# EAGLE board Master board (EAGLE 9.6.1)
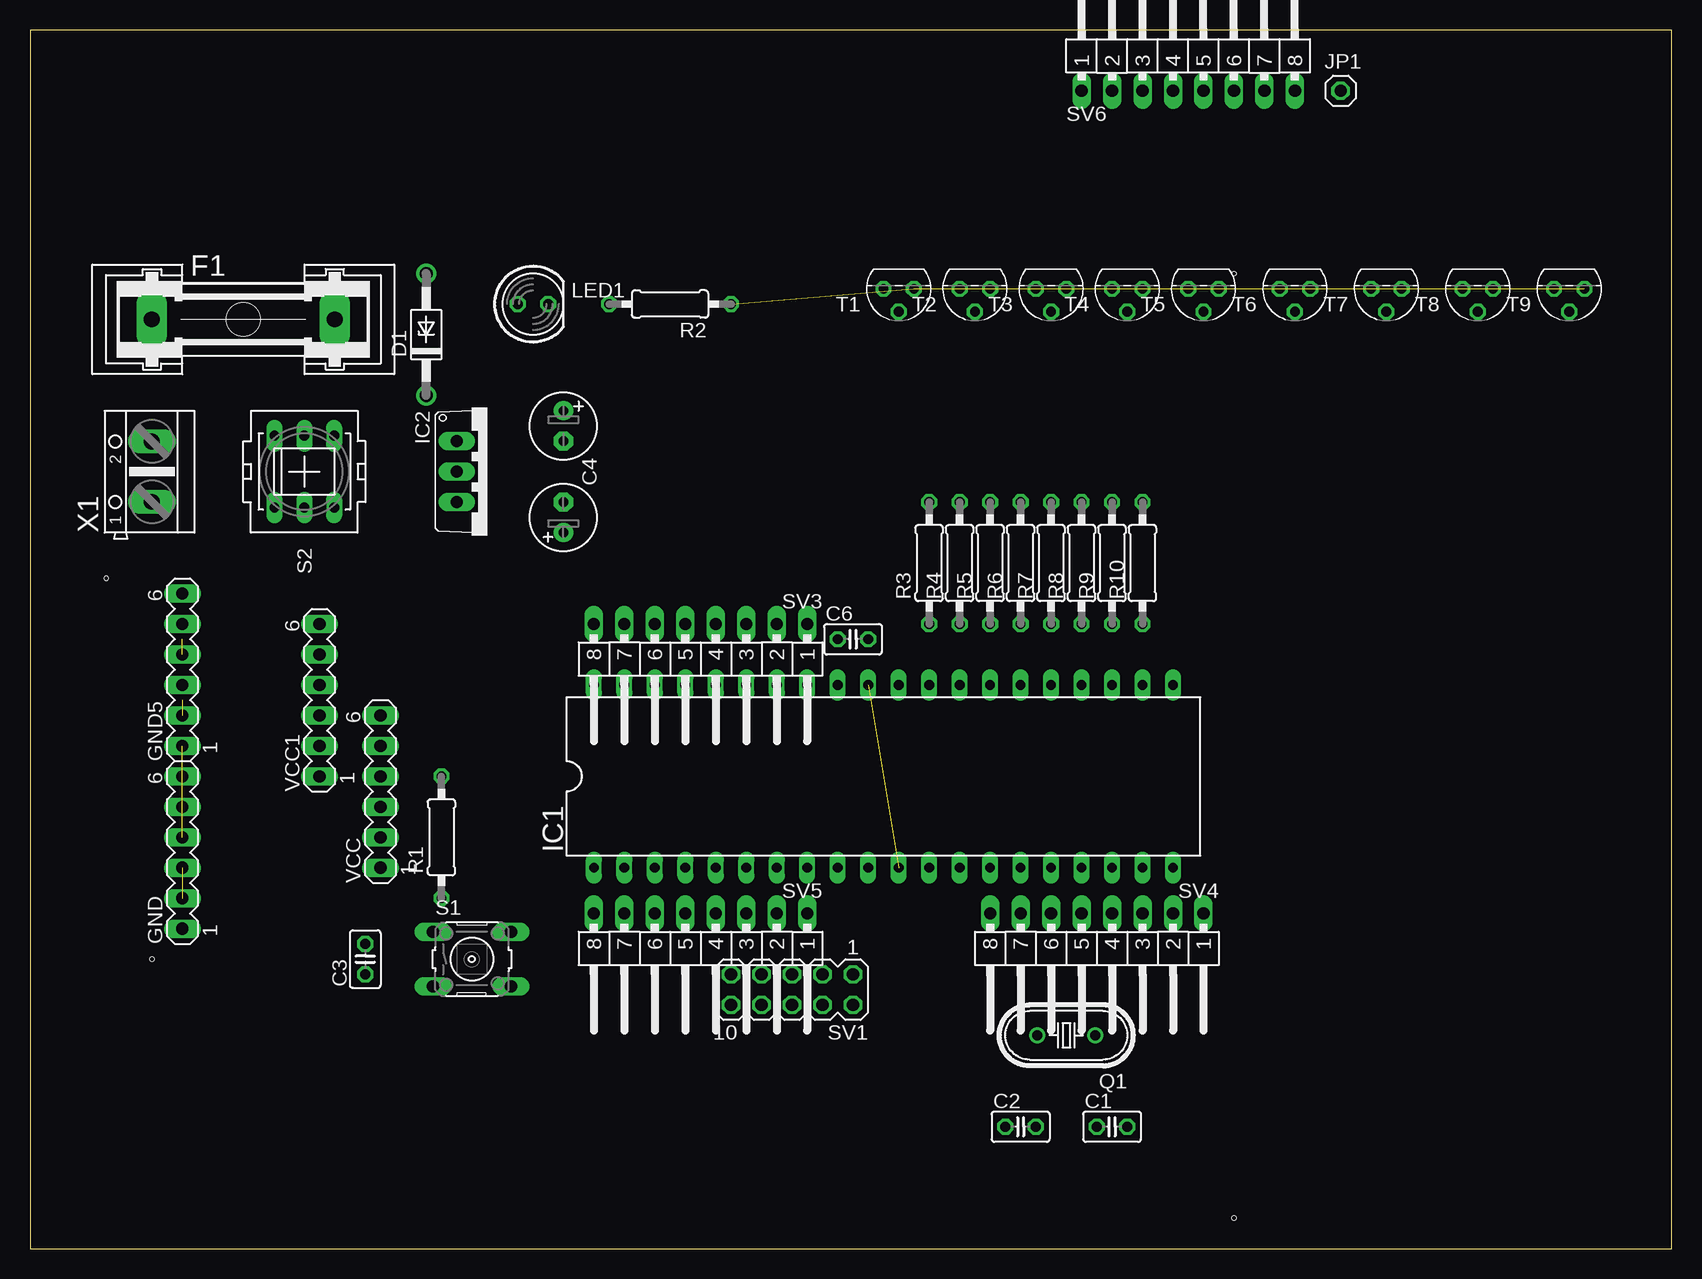
[diagram p0: board, top side]
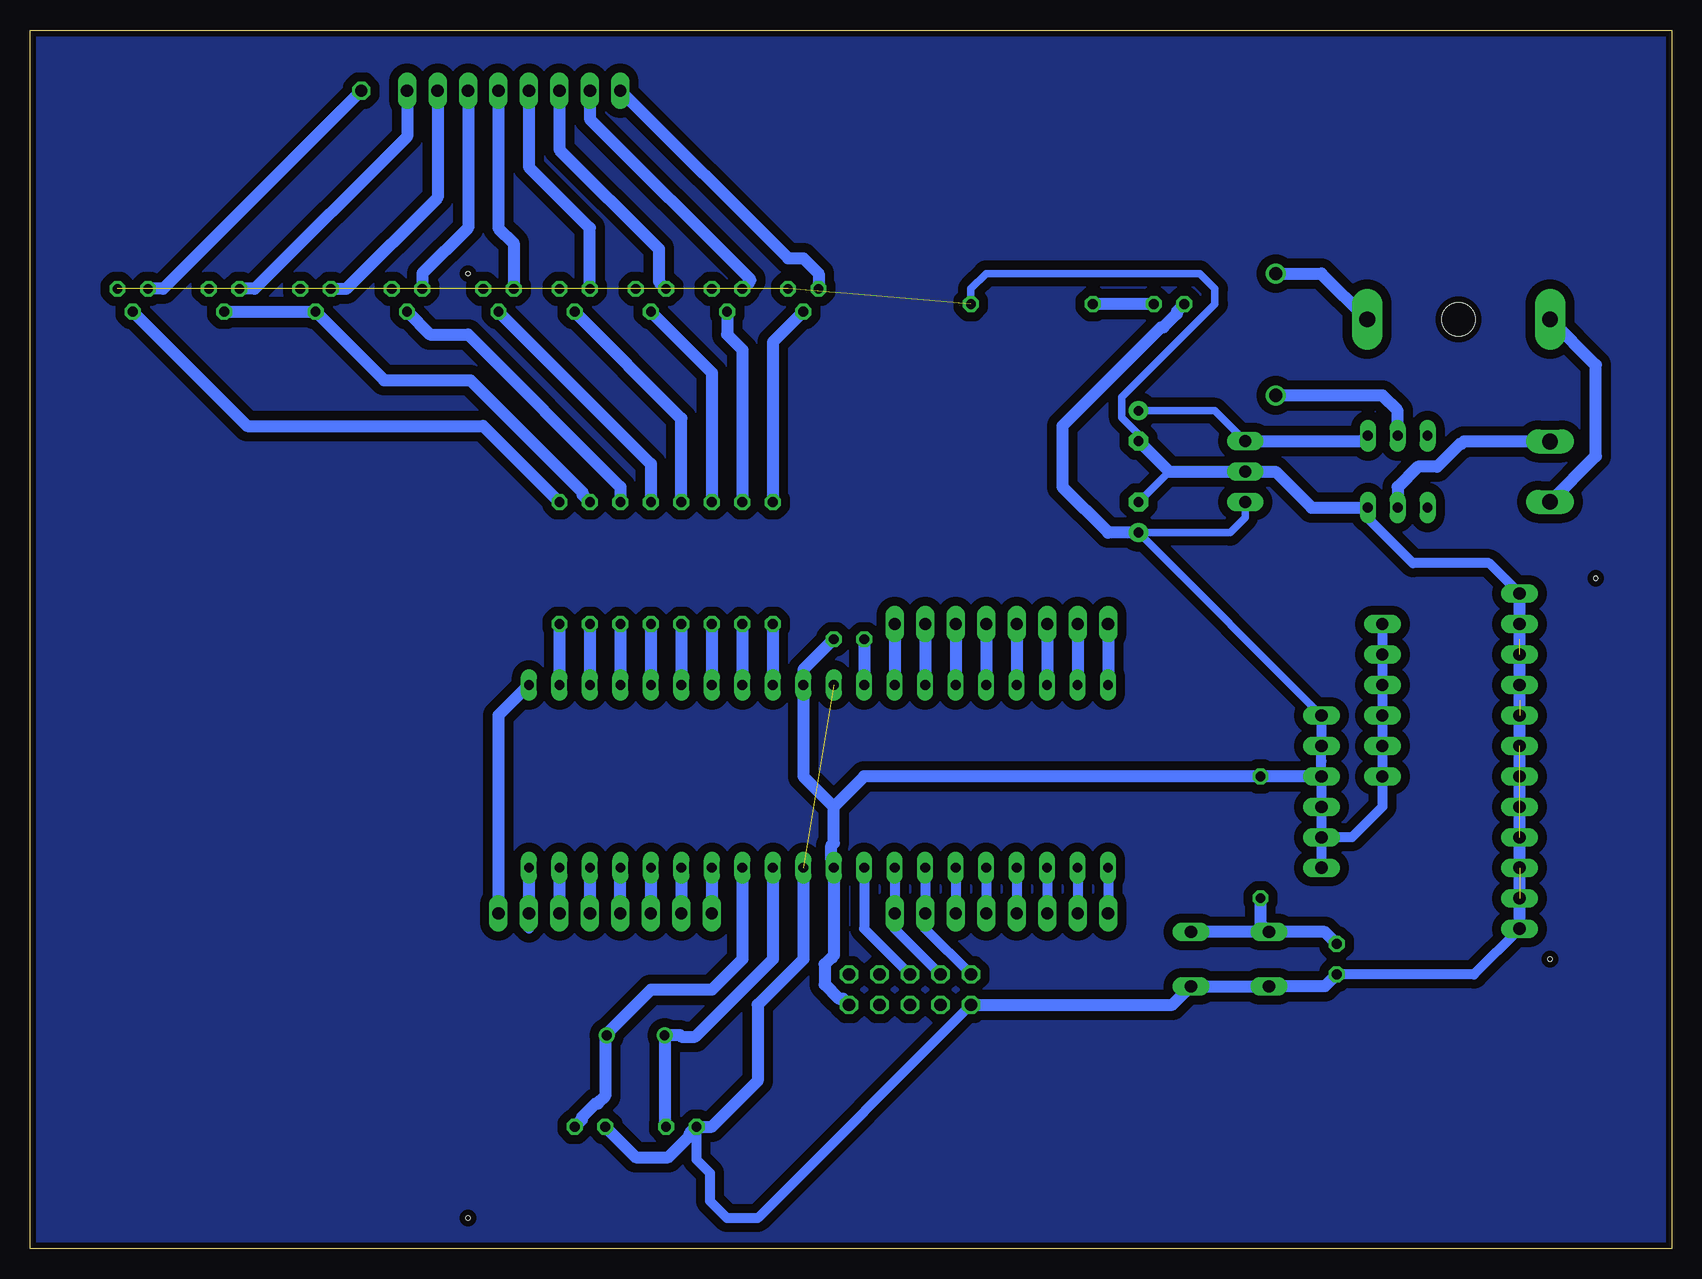
[diagram p1: board, bottom side, seen from below]

Size 136.83 x 101.59 mm. Coordinates in mm from the lower left corner, seen from the top.
Outline: 0,0 136.83,0 136.83,101.59 0,101.59 0,0
Copper layers (1*16): Top 0.035mm / dielectric 1.5mm / Bottom 0.035mm
Design rules "default *": minimum track width 25mil, minimum drill 0.35mm, track to track 30mil, track to pad 30mil, pad to pad 30mil, via to via 6mil, smd to smd 6mil, copper to edge 20mil, drill to drill 6mil, minimum pad ring 10mil, minimum via ring 8mil, stop-mask expansion 4mil, vias tented up to drill 0mil, thermal gap 10mil
Holes 0.35 mm at 100.33,81.28 6.35,55.88 10.16,24.13 100.33,2.54

## Footprints (pad centres in the part's own frame; a part is rotated, then mirrored left to right if it is on the bottom)
C025-025X050 = drill 0.813 octagon: 1 -1.27,0; 2 1.27,0
E2,5-6 = drill 0.813 pad 1.6: + -1.27,0 | drill 0.813 pad 1.6 octagon: - 1.27,0
DO41Z10 = drill 1.118: A 5.08,0; C -5.08,0
GSH15 = drill 1.321 pad 2.54 long: 1 -7.62,0; 2 7.62,0 | hole 2.794: 0,0
MA06-1 = drill 1.016 long: 1 -6.35,0; 2 -3.81,0; 3 -1.27,0; 4 1.27,0; 5 3.81,0; 6 6.35,0
DIL40 = drill 0.813 long: 1 -24.13,-7.62; 2 -21.59,-7.62; 3 -19.05,-7.62; 4 -16.51,-7.62; 5 -13.97,-7.62; 6 -11.43,-7.62; 7 -8.89,-7.62; 8 -6.35,-7.62; 9 -3.81,-7.62; 10 -1.27,-7.62; 11 1.27,-7.62; 12 3.81,-7.62; 13 6.35,-7.62; 14 8.89,-7.62; 15 11.43,-7.62; 16 13.97,-7.62; 17 16.51,-7.62; 18 19.05,-7.62; 19 21.59,-7.62; 20 24.13,-7.62; 21 24.13,7.62; 22 21.59,7.62; 23 19.05,7.62; 24 16.51,7.62; 25 13.97,7.62; 26 11.43,7.62; 27 8.89,7.62; 28 6.35,7.62; 29 3.81,7.62; 30 1.27,7.62; 31 -1.27,7.62; 32 -3.81,7.62; 33 -6.35,7.62; 34 -8.89,7.62; 35 -11.43,7.62; 36 -13.97,7.62; 37 -16.51,7.62; 38 -19.05,7.62; 39 -21.59,7.62; 40 -24.13,7.62
TO220V = drill 1.016 long: 1 -2.54,-2.54; 2 0,-2.54; 3 2.54,-2.54
1X01 = drill 1.016 octagon: 1 0,0
LED5MM = drill 0.813 octagon: A -1.27,0; K 1.27,0
HC49U70 = drill 0.813: 1 -2.413,0; 2 2.413,0
0207/10 = drill 0.813 octagon: 1 -5.08,0; 2 5.08,0
B3F-10XX = drill 1.016 long: 1 -3.251,2.261; 2 3.251,2.261; 3 -3.251,-2.261; 4 3.251,-2.261
PVA2R = drill 0.813 long: 1 -2.997,2.489; 2 -2.997,0; 3 -2.997,-2.489; 4 2.997,2.489; 5 2.997,0; 6 2.997,-2.489
MA05-2 = drill 1.016 octagon: 1 -5.08,-1.27; 2 -5.08,1.27; 3 -2.54,-1.27; 4 -2.54,1.27; 5 0,-1.27; 6 0,1.27; 7 2.54,-1.27; 8 2.54,1.27; 9 5.08,-1.27; 10 5.08,1.27
MA08-1W = drill 1.016 long: 1 -8.89,0; 2 -6.35,0; 3 -3.81,0; 4 -1.27,0; 5 1.27,0; 6 3.81,0; 7 6.35,0; 8 8.89,0
TO92 = drill 0.813 octagon: 1 1.27,0; 2 0,1.905; 3 -1.27,0
AK500/2 = drill 1.321 long: 1 -2.515,0; 2 2.515,0

## Placement (x,y rotation side)
C1  22pf  [C025-025X050]  90.17,10.16 0 top
C2  22pf  [C025-025X050]  82.55,10.16 0 top
C3  [C025-025X050]  27.94,24.13 90 top
C4  10uf  [E2,5-6]  44.45,68.58 270 top
C5  10uf  [E2,5-6]  44.45,60.96 90 top
C6  [C025-025X050]  68.58,50.8 0 top
D1  1N4728  [DO41Z10]  33.02,76.2 90 top
F1  [GSH15]  17.78,77.47 0 top
GND  [MA06-1]  12.7,33.02 90 top
GND5  [MA06-1]  12.7,48.26 90 top
IC1  MEGA16-P  [DIL40]  71.12,39.37 0 top
IC2  7805TV  [TO220V]  38.1,64.77 270 top
JP1  [1X01]  109.22,96.52 0 top
LED1  [LED5MM]  41.91,78.74 0 top
Q1  [HC49U70]  86.36,17.78 180 top
R1  10k  [0207/10]  34.29,34.29 90 top
R2  220  [0207/10]  53.34,78.74 180 top
R3  [0207/10]  74.93,57.15 90 top
R4  [0207/10]  77.47,57.15 90 top
R5  [0207/10]  80.01,57.15 90 top
R6  [0207/10]  82.55,57.15 90 top
R7  [0207/10]  85.09,57.15 90 top
R8  [0207/10]  87.63,57.15 90 top
R9  [0207/10]  90.17,57.15 90 top
R10  [0207/10]  92.71,57.15 90 top
S1  [B3F-10XX]  36.83,24.13 0 top
S2  PVA2R  [PVA2R]  22.86,64.77 270 top
SV1  [MA05-2]  63.5,21.59 180 top
SV3  [MA08-1W]  55.88,52.07 180 top
SV4  [MA08-1W]  88.9,27.94 180 top
SV5  [MA08-1W]  55.88,27.94 180 top
SV6  [MA08-1W]  96.52,96.52 0 top
T1  2N5088  [TO92]  72.39,80.01 180 top
T2  2N5088  [TO92]  78.74,80.01 180 top
T3  2N5088  [TO92]  85.09,80.01 180 top
T4  2N5088  [TO92]  91.44,80.01 180 top
T5  2N5088  [TO92]  97.79,80.01 180 top
T6  2N5088  [TO92]  105.41,80.01 180 top
T7  2N5088  [TO92]  113.03,80.01 180 top
T8  2N5088  [TO92]  120.65,80.01 180 top
T9  2N5088  [TO92]  128.27,80.01 180 top
VCC  [MA06-1]  29.21,38.1 90 top
VCC1  [MA06-1]  24.13,45.72 90 top
X1  [AK500/2]  10.16,64.77 90 top

## Library data of the parts
C1-C6 = rcl; SPICEPREFIX: C
D1 = diode
F1 = fuse; MPN: 64900001039; OC_FARNELL: 1271673; OC_NEWARK: 02P0318
GND GND5 SV1 SV3-SV6 VCC VCC1 = con-lstb; OC_FARNELL: unknown; OC_NEWARK: unknown
IC1 = atmel; MPN: ATMEGA16-16PU; OC_FARNELL: 9171142; OC_NEWARK: 01M6885
IC2 = linear
JP1 = pinhead
LED1 = led
Q1 = crystal; OC_FARNELL: unknown; OC_NEWARK: unknown
R1-R10 = rcl; SPICEPREFIX: R
S1 = switch-omron; MPN: B3F-1000; OC_FARNELL: 176432; OC_NEWARK: 36M3542
S2 = switch-misc
T1-T9 = transistor-neu-to92
X1 = con-ptr500; OC_FARNELL: unknown; OC_NEWARK: unknown

## Nets
GND: C1.1 C2.1 C3.1 C4.- C5.- GND5.1 GND5.2 GND5.3 GND5.4 GND5.5 GND5.6 GND.1 GND.2 GND.3 GND.4 GND.5 GND.6 IC1.11 IC1.31 IC2.2 R2.1 S1.3 S1.4 S2.4 SV1.10 T1.3 T2.3 T3.3 T4.3 T5.3 T6.3 T7.3 T8.3 T9.3
N$1: C1.2 IC1.13 Q1.1
N$2: C2.2 IC1.12 Q1.2
N$3: IC1.6 SV5.3
N$4: IC1.7 SV1.9 SV5.2
N$5: IC1.8 SV1.7 SV5.1
N$6: C4.+ IC2.1 S2.1
N$7: IC1.21 SV4.1
N$8: C3.2 R1.1 S1.1 S1.2
N$9: LED1.K R2.2
N$10: IC1.33 SV3.1
N$11: IC1.34 SV3.2
N$12: IC1.35 SV3.3
N$13: IC1.36 SV3.4
N$14: IC1.20 SV4.2
N$15: D1.A F1.2
N$16: F1.1 X1.1
N$17: D1.C S2.2
N$18: IC1.19 SV4.3
N$19: S2.5 X1.2
N$20: IC1.29 R3.1
N$21: IC1.28 R4.1
N$22: IC1.23 R9.1
N$23: IC1.27 R5.1
N$24: IC1.26 R6.1
N$25: IC1.25 R7.1
N$26: IC1.22 R10.1
N$28: IC1.37 SV3.5
N$29: IC1.38 SV3.6
N$30: IC1.39 SV3.7
N$31: IC1.40 SV3.8
N$32: IC1.18 SV4.4
N$33: C6.1 IC1.32
N$34: IC1.17 SV4.5
N$35: IC1.16 SV4.6
N$36: IC1.15 SV4.7
N$37: IC1.14 SV4.8
N$38: IC1.5 SV5.4
N$39: IC1.4 SV5.5
N$40: IC1.3 SV5.6
N$41: C5.+ C6.2 IC1.10 IC1.30 IC2.3 LED1.A R1.2 SV1.2 VCC1.1 VCC1.2 VCC1.3 VCC1.4 VCC1.5 VCC1.6 VCC.1 VCC.2 VCC.3 VCC.4 VCC.5 VCC.6
N$42: IC1.2 SV5.7
N$43: IC1.1 SV5.8
N$45: R4.2 T2.2
N$47: R5.2 T3.2
N$48: R3.2 T1.2
N$50: R6.2 T4.2
N$52: R7.2 T5.2
N$53: IC1.24 R8.1
N$54: R8.2 T6.2
N$56: R9.2 T7.2 T8.2
N$58: R10.2 T9.2
N$59: SV6.2 T2.1
N$60: SV6.3 T3.1
N$61: SV6.4 T4.1
N$62: SV6.5 T5.1
N$63: SV6.1 T1.1
N$64: SV6.6 T6.1
N$65: SV6.7 T7.1
N$66: SV6.8 T8.1
N$68: JP1.1 T9.1
S$1: IC1.9 SV1.5

## Tracks (layer width: path | path; a pad name or v marks a point on that pad's centre or on a via)
22
  pour Bottom: 0,0 137.16,0 137.16,101.6 0,101.6
GND  (16 unrouted)
  Bottom 0.254: 76.2,20.32 76.2,15.24 | 33.02,21.87 S1.3 | 40.5,21.45 41.63,20.32
  Bottom 0.381: 80.01,3.81 80.17,3.98 | SV1.10 71.12,7.62
  Bottom 0.635: 33.02,64.77 31.29,63.04 | C5.- 41.91,64.77 | GND5.1 GND.2 | C4.- 44.45,67.87 45.85,69.27 45.85,70.99 38.1,78.74 38.1,80.01 39.37,81.28 57.15,81.28 58.42,80.01 R2.1
  Bottom 0.813: C2.1 81.28,7.41 80.17,6.3 80.17,3.98 | 80.01,3.81 78.74,2.54 76.2,2.54 SV1.10 | GND.2 GND.1 16.51,22.86 C3.1 | S1.3 S1.4 40.5,21.45 | 12.7,50.8 GND5.5 GND5.6 15.24,57.15 21.59,57.15 25.35,60.91 S2.4 | 12.7,45.72 GND5.3 | GND5.2 GND5.1
  Bottom 1.016: C4.- 41.91,64.77 IC2.2 33.02,64.77 30.02,61.77 S2.4 | SV1.10 41.63,20.32 S1.4 33.02,21.87 28.93,21.87 C3.1 | GND.1 GND5.6 | C1.1 86.36,7.62 83.63,7.62 81.89,9.36 81.89,9.55 C2.1 80.01,10.16 76.2,13.97 76.2,20.32 72.39,24.13 IC1.11
N$1
  Bottom 0.254: 88.9,17.78 Q1.1
  Bottom 0.635: C1.2 88.9,12.7 88.9,17.78
  Bottom 1.016: Q1.1 88.9,17.65 88.9,12.7 89.51,12.09 89.7,12.09 90.83,10.96 90.83,10.77 C1.2 | IC1.13 77.47,24.13 80.01,21.59 85.09,21.59 88.9,17.78
N$2
  Bottom 0.635: C2.2 83.82,17.65 | 83.82,17.65 Q1.2 | 83.82,17.65 82.55,17.65
  Bottom 1.016: C2.2 83.95,10.29 Q1.2 82.68,17.78 82.55,17.65 81.41,17.65 74.93,24.13 IC1.12
N$3
  Bottom 0.813: IC1.6 SV5.3
N$4
  Bottom 0.381: SV1.9 62.23,26.67
  Bottom 0.813: 58.42,22.88 58.45,22.88 62.23,26.67 SV5.2 IC1.7
N$5
  Bottom 0.813: SV1.7 64.77,26.67 SV5.1 IC1.8
N$6
  Bottom 0.254: IC2.1 36.83,67.31
  Bottom 0.635: 25.4,67.77 S2.1 | IC2.1 38.1,69.85 C4.+
  Bottom 1.016: IC2.1 25.86,67.31 25.4,67.77
N$7
  Bottom 1.016: IC1.21 97.79,44.45 SV4.1
N$8
  Bottom 1.016: C3.2 28.93,26.39 S1.1 | R1.1 34.29,27.1 S1.1 | S1.1 S1.2 40.22,26.25
N$9
  Bottom 1.016: LED1.K R2.2
N$10
  Bottom 1.016: SV3.1 IC1.33
N$11
  Bottom 1.016: SV3.2 IC1.34
N$12
  Bottom 1.016: SV3.3 IC1.35
N$13
  Bottom 1.016: SV3.4 IC1.36
N$14
  Bottom 0.813: SV4.2 95.25,26.67
  Bottom 1.016: IC1.20 SV4.2
N$15
  Bottom 1.016: D1.A 29.21,81.28 F1.2
N$16
  Bottom 1.016: X1.1 6.35,66.06 6.35,73.66 F1.1
N$17
  Bottom 0.635: 26.21,71.12 D1.C
  Bottom 1.016: S2.2 22.86,69.85 24.13,71.12 D1.C
N$18
  Bottom 1.016: IC1.19 SV4.3
N$19
  Bottom 1.016: X1.2 17.35,67.28 17.55,67.08 17.67,67.08 19.57,65.18 21.18,65.18 22.86,63.5 S2.5
N$20
  Bottom 1.016: R3.1 IC1.29
N$21
  Bottom 1.016: R4.1 IC1.28
N$22
  Bottom 1.016: R9.1 IC1.23
N$23
  Bottom 1.016: R5.1 IC1.27
N$24
  Bottom 1.016: R6.1 IC1.26
N$25
  Bottom 1.016: R7.1 IC1.25
N$26
  Bottom 1.016: R10.1 IC1.22
N$28
  Bottom 1.016: SV3.5 IC1.37
N$29
  Bottom 1.016: SV3.6 IC1.38
N$30
  Bottom 1.016: SV3.7 IC1.39
N$31
  Bottom 1.016: SV3.8 IC1.40
N$32
  Bottom 1.016: IC1.18 SV4.4
N$33
  Bottom 1.016: C6.1 IC1.32
N$34
  Bottom 1.016: SV4.5 IC1.17
N$35
  Bottom 1.016: IC1.16 SV4.6
N$36
  Bottom 1.016: IC1.15 SV4.7
N$37
  Bottom 1.016: IC1.14 SV4.8
N$38
  Bottom 0.813: IC1.5 SV5.4
N$39
  Bottom 0.813: IC1.4 SV5.5
N$40
  Bottom 0.813: IC1.3 SV5.6
N$41
  Bottom 0.254: VCC.4 VCC.3 VCC.2 VCC.1
  Bottom 0.635: IC1.10 69.85,24.13 | IC2.3 35.56,60.96 36.83,59.69 C5.+ VCC.6
  Bottom 0.813: VCC1.6 VCC1.5 VCC1.4 VCC1.3 VCC1.2 VCC1.1 24.13,36.83 26.67,34.29 VCC.2 | VCC.6 VCC.5 | 29.21,40.64 VCC.5 | VCC.5 VCC.4 VCC.1
  Bottom 1.016: C5.+ 46.99,59.69 50.8,63.5 50.8,68.58 42.57,76.81 42.38,76.81 41.25,77.94 41.25,78.13 LED1.A | C6.2 72.39,48.26 IC1.30 72.39,39.37 69.85,36.83 | 69.85,36.83 69.85,33.81 70.04,33.62 70.04,32.41 69.85,32.23 IC1.10 69.85,24.46 70.61,23.7 70.61,22.02 69.42,20.83 69.09,20.83 SV1.2 | VCC.4 R1.2 67.31,39.37 69.85,36.83
N$42
  Bottom 0.813: IC1.2 SV5.7
N$43
  Bottom 0.813: IC1.1 SV5.8
N$45
  Bottom 1.016: T2.2 78.74,76.2 77.47,74.93 R4.2
N$47
  Bottom 1.016: T3.2 80.01,73.03 R5.2
N$48
  Bottom 1.016: T1.2 74.93,75.56 R3.2
N$50
  Bottom 1.016: T4.2 82.55,69.22 R6.2
N$52
  Bottom 1.016: T5.2 85.09,65.41 R7.2
N$53
  Bottom 0.635: 87.91,46.99 IC1.24
  Bottom 1.016: R8.1 IC1.24
N$54
  Bottom 1.016: T6.2 103.5,76.2 100.33,76.2 87.63,63.5 R8.2
N$56
  Bottom 1.016: R9.2 90.78,62.84 90.78,63.03 100.14,72.39 107.31,72.39 T7.2 113.48,78.11 113.5,78.08 120.18,78.08 120.2,78.11 T8.2
N$58
  Bottom 1.016: R10.2 99.06,68.58 118.75,68.58 T9.2
N$59
  Bottom 1.016: SV6.2 90.17,94.17 76.81,80.81 76.81,80.67 T2.1
N$60
  Bottom 1.016: SV6.3 92.71,91.63 84.43,83.35 84.43,80.62 T3.1
N$61
  Bottom 1.016: SV6.4 95.25,90.17 90.17,85.09 T4.1
N$62
  Bottom 1.016: SV6.5 97.79,85.09 96.52,83.82 T5.1
N$63
  Bottom 1.016: SV6.1 73.66,82.55 72.39,82.55 71.12,81.28 T1.1
N$64
  Bottom 1.016: SV6.6 100.33,85.09 104.14,81.28 T6.1
N$65
  Bottom 1.016: SV6.7 102.87,87.63 110.49,80.01 T7.1
N$66
  Bottom 1.016: SV6.8 105.41,92.71 118.11,80.01 T8.1
N$68
  Bottom 1.016: JP1.1 125.73,80.01 T9.1
S$1
  Bottom 0.813: IC1.9 67.31,26.67 SV1.5